# Altium PCB PCB2test.PcbDoc
Units mm, origin at the board's own origin, x right, y up, seen from the top; angles counter-clockwise.
Board outline 192.75 x 73.36 mm, 2 copper layers (Top Layer, Bottom Layer); 15 components, 69 nets, 286 pads, 0 vias.
Unrouted connection lines stored in the file: 207.
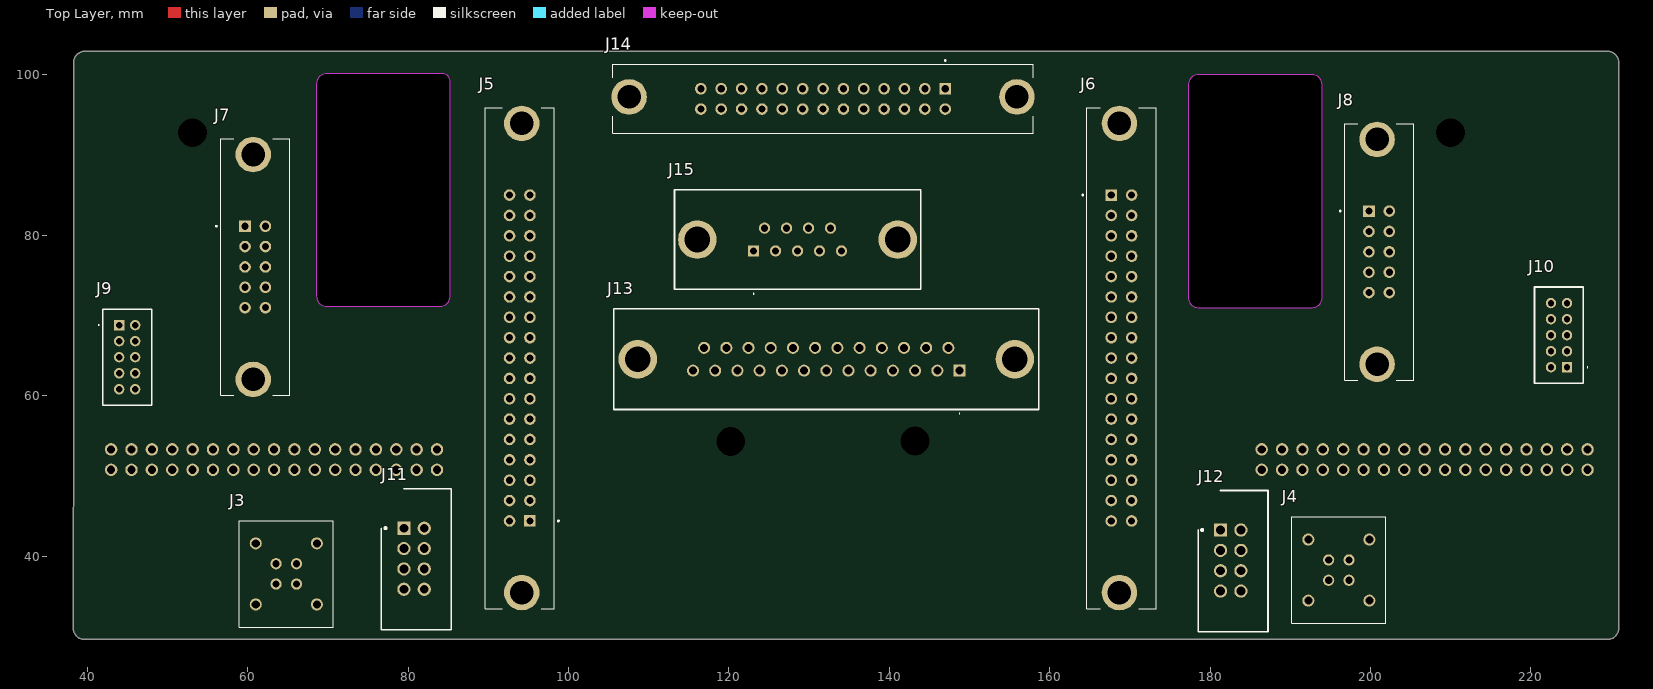
[diagram p0: Top Layer view]
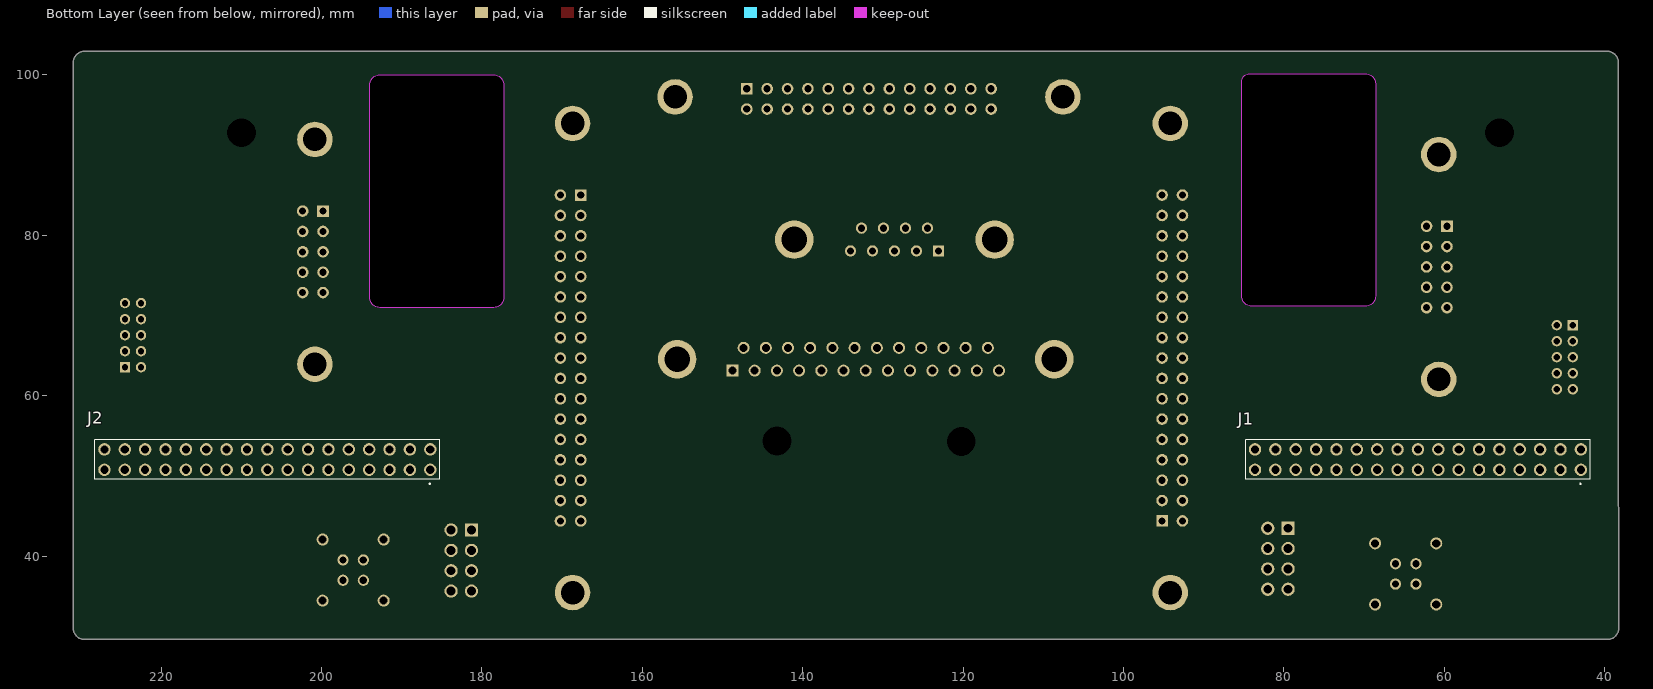
[diagram p1: Bottom Layer view, seen from below]

## Layer stack, top to bottom
Top Solder: solder mask 0.0102, Solder Resist, Dk 3.5
Top Layer: signal copper 0.0356
Dielectric 1: dielectric 0.32, FR-4, Dk 4.8
Bottom Layer: signal copper 0.0356
Bottom Solder: solder mask 0.0102, Solder Resist, Dk 3.5

## Board outline
38.225,30.995 38.225,34.375 38.273,57.925 38.273,101.555 cw(c39.67,101.555) 39.67,102.952 93.348,102.952 93.37,102.954 171.83,102.954 171.852,102.952 229.58,102.952 cw(c229.58,101.555) 230.977,101.555 230.977,70.437 230.977,70.05 230.977,70.437 230.977,30.995 cw(c229.58,30.995) 229.58,29.598 215.35,29.598 42.325,29.598 39.622,29.598 cw(c39.622,30.995)
cut-out: 178.545,70.988 192.73,70.988 ccw(c192.73,72.258) 194,72.258 194,98.742 ccw(c192.73,98.742) 192.73,100.013 178.545,100.013 ccw(c178.545,98.742) 177.275,98.742 177.275,72.258 ccw(c178.545,72.258)
cut-out: 69.82,71.154 83.98,71.154 ccw(c83.98,72.424) 85.25,72.424 85.25,99.176 ccw(c84.271,99.176) 84.271,100.154 69.82,100.154 ccw(c69.82,98.884) 68.55,98.884 68.55,72.424 ccw(c69.82,72.424)

## Design rules (kind name [scope] priority, off if disabled: settings)
Clearance [All] p1: gap=0.254 ignorepadtopadclearanceinfootprint=FALSE
PolygonConnect [All] p1: connectstyle=Relief reliefconductorwidth=0.254 reliefentries=4 polygonreliefangle="90 Angle" airgapwidth=0.254
RoutingVias [All] p1: holewidth=0.711 width=1.27 viastyle="Through Hole" minholewidth=0.711 minwidth=1.27 maxholewidth=0.711 maxwidth=1.27
SolderMaskExpansion [All] p1: expansion=0.102 istentingtop=FALSE
SupplyNets "Schematic Supply Nets" [InNet('GND')] p1: voltage=0.000
Width [All] p1: maxlimit=0.254 minlimit=0.254 preferedwidth=0.254
30 further rules are at their usual default settings.

## Components (designator, comment, footprint, x,y, rotation, side; value= is the part's Value field where it differs from the comment)
J1 "ESQ-117-33-T-D" ESQ-117-Y-X-D 42.95,50.757 r180 bottom locked
J2 "ESQ-117-33-T-D" ESQ-117-Y-X-D 186.45,50.757 r180 bottom
J3 "EXP.0S.304.HLN" EXP0S304HLN 66.065,39.04 r270 top
J4 "EXP.0S.304.HLN" EXP0S304HLN 197.34,39.515 r270 top
J5 "D3431-6002-AR" D3431-6002-AR 95.175,44.375 r90 top locked
J6 "D3431-6002-AR" D3431-6002-AR 167.685,85.015 r270 top locked
J7 "D3793-6002-AR" D3793-6002-AR 59.65,81.135 r270 top
J8 "D3793-6002-AR" D3793-6002-AR 199.825,83.02 r270 top
J9 "98414-G08-10LF" 98414G0810LF 43.95,68.8 r270 top
J10 "98414-G08-10LF" 98414G0810LF 224.525,63.55 r90 top
J11 "N2508-6002-RB" SHDR8W64P254_2X4_1748X859X1004P 79.46,43.47 r270 top
J12 "N2508-6002-RB" SHDR8W64P254_2X4_1748X859X1004P 181.31,43.245 r270 top
J13 "L17HTNBHPOL2RM84C" L17HTNBHPOL2RM84C 148.76,63.127 r180 top locked
J14 "D3429-6302-AR" D34296302AR 146.975,98.282 r180 top locked
J15 "L177DFE09ST" L177DFE09ST 123.08,78.05 r180 top

## Footprints (in the part's own frame and the unit in brackets; to place one, negate y for a bottom-side part, rotate by r counter-clockwise, add the part's x,y. Pads: shape width x height; smd on the part's side, far side on the other; paste and mask are expansions set on the pad)
98414G0810LF [mm]
  rect 1.3x1.3 hole 0.8: A1(0,0)
  round 1.3 hole 0.8: A2(2,0) A3(4,0) A4(6,0) A5(8,0) B1(0,2) B2(2,2) B3(4,2) B4(6,2) B5(8,2)
  silkscreen extent -2,-2.6 10,4.05, body extent -2,-2.05 10,4.05, height 6.3
D3431-6002-AR [mm]
  rect 1.446x1.446 hole 0.89: 1(0,0)
  round 1.446 hole 0.89: 2(0,2.54) 3(2.54,0) 4(2.54,2.54) 5(5.08,0) 6(5.08,2.54) 7(7.62,0) 8(7.62,2.54) 9(10.16,0) 10(10.16,2.54) 11(12.7,0) 12(12.7,2.54) 13(15.24,0) 14(15.24,2.54) 15(17.78,0) 16(17.78,2.54) 17(20.32,0) 18(20.32,2.54) 19(22.86,0) 20(22.86,2.54) 21(25.4,0) 22(25.4,2.54) 23(27.94,0) 24(27.94,2.54) 25(30.48,0) 26(30.48,2.54) 27(33.02,0) 28(33.02,2.54) 29(35.56,0) 30(35.56,2.54) 31(38.1,0) 32(38.1,2.54) 33(40.64,0) 34(40.64,2.54)
  round 4.425 hole 2.95: MH1(-8.941,1.016) MH2(49.581,1.016)
  silkscreen extent -10.92,-3.61 51.56,5.59
D3793-6002-AR [mm] "Connector"
  rect 1.446x1.446 hole 0.89: 1(0,0)
  round 1.446 hole 0.89: 2(0,2.54) 3(2.54,0) 4(2.54,2.54) 5(5.08,0) 6(5.08,2.54) 7(7.62,0) 8(7.62,2.54) 9(10.16,0) 10(10.16,2.54)
  round 4.425 hole 2.95: MH1(-8.941,1.016) MH2(19.101,1.016)
  silkscreen extent -10.92,-3.63 21.08,5.59, body extent -10.93,-3.06 21.08,5.58, height 17.27
D34296302AR [mm]
  rect 1.446x1.446 hole 0.89: 1(0,0)
  round 1.446 hole 0.89: 2(0,2.54) 3(2.54,0) 4(2.54,2.54) 5(5.08,0) 6(5.08,2.54) 7(7.62,0) 8(7.62,2.54) 9(10.16,0) 10(10.16,2.54) 11(12.7,0) 12(12.7,2.54) 13(15.24,0) 14(15.24,2.54) 15(17.78,0) 16(17.78,2.54) 17(20.32,0) 18(20.32,2.54) 19(22.86,0) 20(22.86,2.54) 21(25.4,0) 22(25.4,2.54) 23(27.94,0) 24(27.94,2.54) 25(30.48,0) 26(30.48,2.54)
  round 4.425 hole 2.95: MH1(-8.941,1.016) MH2(39.421,1.016)
  silkscreen extent -10.98,-3.58 41.46,5.57, body extent -10.96,-3.07 41.36,5.57, height 17.27
ESQ-117-Y-X-D [mm]
  round 1.55 hole 1.02: 1(0,0) 2(0,2.54) 3(-2.54,0) 4(-2.54,2.54) 5(-5.08,0) 6(-5.08,2.54) 7(-7.62,0) 8(-7.62,2.54) 9(-10.16,0) 10(-10.16,2.54) 11(-12.7,0) 12(-12.7,2.54) 13(-15.24,0) 14(-15.24,2.54) 15(-17.78,0) 16(-17.78,2.54) 17(-20.32,0) 18(-20.32,2.54) 19(-22.86,0) 20(-22.86,2.54) 21(-25.4,0) 22(-25.4,2.54) 23(-27.94,0) 24(-27.94,2.54) 25(-30.48,0) 26(-30.48,2.54) 27(-33.02,0) 28(-33.02,2.54) 29(-35.56,0) 30(-35.56,2.54) 31(-38.1,0) 32(-38.1,2.54) 33(-40.64,0) 34(-40.64,2.54)
  silkscreen extent -41.82,-1.8 1.18,3.74, body extent -42.14,-1.25 1.54,3.83, height 1.81
EXP0S304HLN [mm]
  round 1.4 hole 0.9: 1(0,0) 2(0,-2.54) 3(2.54,-2.54) 4(2.54,0)
  round 1.5 hole 1: G1(-2.54,2.54) G2(-2.54,-5.08) G3(5.08,-5.08) G4(5.08,2.54)
  silkscreen extent -5.38,-7.12 7.92,4.58, body extent -5.38,-7.19 19.62,4.65, height 13.78
L17HTNBHPOL2RM84C [mm]
  rect 1.5x1.5 hole 1: 1(0,0)
  round 1.5 hole 1: 2(2.77,0) 3(5.54,0) 4(8.31,0) 5(11.08,0) 6(13.85,0) 7(16.62,0) 8(19.39,0) 9(22.16,0) 10(24.93,0) 11(27.7,0) 12(30.47,0) 13(33.24,0) 14(1.385,-2.84) 15(4.155,-2.84) 16(6.925,-2.84) 17(9.695,-2.84) 18(12.465,-2.84) 19(15.235,-2.84) 20(18.005,-2.84) 21(20.775,-2.84) 22(23.545,-2.84) 23(26.315,-2.84) 24(29.085,-2.84) 25(31.855,-2.84)
  round 4.8 hole 3.2: MH1(-6.9,-1.42) MH2(40.14,-1.42)
  silkscreen extent -9.9,-7.7 43.14,5.4, body extent -9.9,-7.7 43.14,4.85, height 12.6
L177DFE09ST [mm]
  rect 1.4x1.4 hole 0.9: 1(0,0)
  round 1.4 hole 0.9: 2(-2.74,0) 3(-5.48,0) 4(-8.22,0) 5(-10.96,0) 6(-1.37,-2.84) 7(-4.11,-2.84) 8(-6.85,-2.84) 9(-9.59,-2.84)
  round 4.8 hole 3.2: MH1(7.02,-1.42) MH2(-17.98,-1.42)
  silkscreen extent -20.83,-7.62 9.87,5.4, body extent -20.83,-7.62 9.87,4.78, height 12.3
SHDR8W64P254_2X4_1748X859X1004P [mm]
  rect 1.65x1.65 hole 1.1: 1(0,0)
  round 1.65 hole 1.1: 2(0,2.54) 3(2.54,0) 4(2.54,2.54) 5(5.08,0) 6(5.08,2.54) 7(7.62,0) 8(7.62,2.54)
  silkscreen extent -4.93,-2.8 12.68,5.92, body extent -4.93,-3.03 12.55,5.57, height 10.04

## Part data
J1 J2: "Connector", Manufacturer_Name=SAMTEC, Manufacturer_Part_Number=ESQ-117-44-T-D, Mouser Part Number=200-ESQ11744TD, Datasheet Link=http://suddendocs.samtec.com/prints/esq-1xx-xx-x-x-xxx-xx-x-xx-mkt.pdf, Mouser Price/Stock=https://www.mouser.com/Search/Refine.aspx?Keyword=200-ESQ11744TD
J3 J4: "Connector", Manufacturer_Name=LEMO, Mouser Part Number=736-EXP0S304HLN, Datasheet Link=https://www.lemo.com/catalog/ROW/UK_English/unipole_multipole.pdf, Height=12mm, Manufacturer_Part_Number=EXP.0S.304.HLN, Mouser Price/Stock=https://www.mouser.co.uk/ProductDetail/LEMO/EXP0S304HLN?qs=g4eXmMl0IezC49McAy%252Bbog%3D%3D
J5 J6 J7 J8: "Connector"
J9 J10: "Connector", Manufacturer_Name=Amphenol, Mouser Part Number=649-98414-G08-10LF, Datasheet Link=https://cdn.amphenol-cs.com/media/wysiwyg/files/drawing/98414.pdf, Height=6.2mm, Manufacturer_Part_Number=98414-G08-10LF, Mouser Price/Stock=https://www.mouser.co.uk/ProductDetail/Amphenol-FCI/98414-G08-10LF?qs=dwWE9K4rTrPm8sS0qAKvPg%3D%3D
J11 J12: "Connector", Manufacturer_Name=3M, Mouser Part Number=517-N2508-6002-RB, Datasheet Link=https://multimedia.3m.com/mws/media/330367O/3m-four-wall-header-2500-series-ts-0770.pdf, Height=10.04mm, Manufacturer_Part_Number=N2508-6002-RB, Mouser Price/Stock=https://www.mouser.com/Search/Refine.aspx?Keyword=517-N2508-6002-RB
J13: "Connector", Manufacturer_Name="Amphenol Communications Solutions", Mouser Part Number=523-17HTNBHPOL2RM84C, Datasheet Link=https://cdn.amphenol-cs.com/media/wysiwyg/files/drawing/l17htnxhpol2rm8xc.pdf, Height=12.5mm, Manufacturer_Part_Number=L17HTNBHPOL2RM84C, Mouser Price/Stock=https://www.mouser.co.uk/ProductDetail/Amphenol-Commercial-Products/L17HTNBHPOL2RM84C?qs=ToP8pWlZ0bO6Ujv8%2FJibmw%3D%3D
J14: "Connector", Manufacturer_Name=3M, Mouser Part Number=517-D3429-6302-AR, Datasheet Link=http://multimedia.3m.com/mws/media/485761O/3mtm-four-wall-header-ts2245.pdf, Height=13.7mm, Manufacturer_Part_Number=D3429-6302-AR, Mouser Price/Stock=https://www.mouser.co.uk/ProductDetail/3M-Electronic-Solutions-Division/D3429-6302-AR?qs=IDj0%2FmHVFfaTU4HTZsyChw%3D%3D
J15: "Connector", Manufacturer_Name=Amphenol, Datasheet Link=https://cdn.amphenol-cs.com/media/wysiwyg/files/drawing/l177dfxxxst.pdf, Height=12.2mm, Manufacturer_Part_Number=L177DFE09ST

## Free pads (board coordinates)
  round 0 hole 3.6 unplated: HOLE1(120.225,54.3) HOLE2(143.225,54.325) HOLE9(210,92.797) HOLE10(53.11,92.797)

## Nets (pads, with @x,y where several pads share a name; then routed paths per layer and width w, separated by ;. In a path a pad name is that pad's centre, name@x,y a point inside that pad or via, vN(x,y) a via of type N, cw(c..) or ccw(c..) an arc to the next point about the centre after c; other vN are vias at no path point)
GND: J5.MH1 J5.MH2 J6.MH1 J6.MH2 J7.MH1 J7.MH2 J8.MH1 J8.MH2 J13.MH1 J13.MH2 J14.MH1 J14.MH2 J15.MH1 J15.MH2
PA1: J1.1 J3.G1 J5.1 J7.1 J9.A1 J11.1 J13.1 J15.1
PA2: J1.2 J3.2 J5.2 J7.2 J9.B1 J11.2 J13.2 J15.2
PA3: J1.3 J3.3 J5.3 J7.3 J9.A2 J11.3 J13.3 J15.3
PA4: J1.4 J3.1 J5.4 J7.4 J9.B2 J11.4 J13.4 J15.4
PA5: J1.5 J3.4 J5.5 J7.5 J9.A3 J11.5 J13.5 J15.5
PA6: J1.6 J5.6 J7.6 J9.B3 J11.6 J13.6 J15.6
PA7: J1.7 J5.7 J7.7 J9.A4 J11.7 J13.7 J15.7
PA8: J1.8 J5.8 J7.8 J9.B4 J11.8 J13.8 J15.8
PA9: J1.9 J5.9 J7.9 J9.A5 J13.9 J15.9
PA10: J1.10 J5.10 J7.10 J9.B5 J13.10
PA11: J1.11 J5.11 J13.11
PA12: J1.12 J5.12 J13.12
PA13: J1.13 J5.13 J13.13
PA14: J1.14 J5.14 J13.14
PA15: J1.15 J5.15 J13.15
PA16: J1.16 J5.16 J13.16
PA17: J1.17 J5.17 J13.17
PA18: J1.18 J5.18 J13.18
PA19: J1.19 J5.19 J13.19
PA20: J1.20 J5.20 J13.20
PA21: J1.21 J5.21 J13.21
PA22: J1.22 J5.22 J13.22
PA23: J1.23 J5.23 J13.23
PA24: J1.24 J5.24 J13.24
PA25: J1.25 J5.25 J13.25
PA26: J1.26 J5.26
PA27: J1.27 J5.27
PA28: J1.28 J5.28
PA29: J1.29 J5.29
PA30: J1.30 J5.30
PA31: J1.31 J5.31
PA32: J1.32 J5.32
PA33: J1.33 J5.33
PA34: J1.34 J5.34
PB1: J2.1 J4.G1 J6.34 J8.1 J10.A1 J12.1 J14.1
PB2: J2.2 J4.2 J6.33 J8.2 J10.B1 J12.2 J14.2
PB3: J2.3 J4.3 J6.32 J8.3 J10.A2 J12.3 J14.3
PB4: J2.4 J4.1 J6.31 J8.4 J10.B2 J12.4 J14.4
PB5: J2.5 J4.4 J6.30 J8.5 J10.A3 J12.5 J14.5
PB6: J2.6 J6.29 J8.6 J10.B3 J12.6 J14.6
PB7: J2.7 J6.28 J8.7 J10.A4 J12.7 J14.7
PB8: J2.8 J6.27 J8.8 J10.B4 J12.8 J14.8
PB9: J2.9 J6.26 J8.9 J10.A5 J14.9
PB10: J2.10 J6.25 J8.10 J10.B5 J14.10
PB11: J2.11 J6.24 J14.11
PB12: J2.12 J6.23 J14.12
PB13: J2.13 J6.22 J14.13
PB14: J2.14 J6.21 J14.14
PB15: J2.15 J6.20 J14.15
PB16: J2.16 J6.19 J14.16
PB17: J2.17 J6.18 J14.17
PB18: J2.18 J6.17 J14.18
PB19: J2.19 J6.16 J14.19
PB20: J2.20 J6.15 J14.20
PB21: J2.21 J6.14 J14.21
PB22: J2.22 J6.13 J14.22
PB23: J2.23 J6.12 J14.23
PB24: J2.24 J6.11 J14.24
PB25: J2.25 J6.10 J14.25
PB26: J2.26 J6.9 J14.26
PB27: J2.27 J6.8
PB28: J2.28 J6.7
PB29: J2.29 J6.6
PB30: J2.30 J6.5
PB31: J2.31 J6.4
PB32: J2.32 J6.3
PB33: J2.33 J6.2
PB34: J2.34 J6.1
pads on no net: J3.G2 J3.G3 J3.G4 J4.G2 J4.G3 J4.G4

## Silkscreen, mask and mechanical layers (free items; w line width, h text height)
Mechanical 1:
  lines w0.254: 38.4,99.057 38.4,96.607 38.4,57.925 38.352,34.375 38.352,30.995 ccw(c39.622,30.995) 39.622,29.725 42.325,29.725 215.35,29.725 224.305,29.725 ; 38.4,99.075 38.4,101.555 cw(c39.67,101.555) 39.67,102.825 93.375,102.825 ; 69.807,71.15 cw(c69.807,72.357) 68.6,72.357 68.6,72.42 68.6,98.88 cw(c69.87,98.88) 69.87,100.15 84.321,100.15 cw(c84.321,99.171) 85.3,99.171 85.3,72.295 cw(c84.155,72.295) 84.155,71.15 69.87,71.15 ; 93.37,102.827 171.83,102.827 ; 171.85,102.825 224.305,102.825 ; 224.225,102.825 229.58,102.825 cw(c229.58,101.555) 230.85,101.555 230.85,70.05 ; 224.275,29.725 229.58,29.725 ccw(c229.58,30.995) 230.85,30.995 230.85,42.225 ; 230.85,42.175 230.85,70.437 ; 177.3,72.245 ccw(c178.57,72.245) 178.57,70.975 192.755,70.975 ccw(c192.755,72.245) 194.025,72.245 194.025,75.245 194.025,94.655 194.025,97.625 194.025,98.73 ccw(c192.755,98.73) 192.755,100 191.675,100 178.8,100 178.57,100 ccw(c178.57,98.73) 177.3,98.73 177.3,94.655 177.3,75.245 177.3,72.245